# Altium PCB Светотиристор.PcbDoc
Units mm, origin at the board's own origin, x right, y up, seen from the top; angles counter-clockwise.
Board outline 33.88 x 24.43 mm, 2 copper layers (Top Layer, Bottom Layer); 2 components, 0 nets, 52 pads, 0 vias.
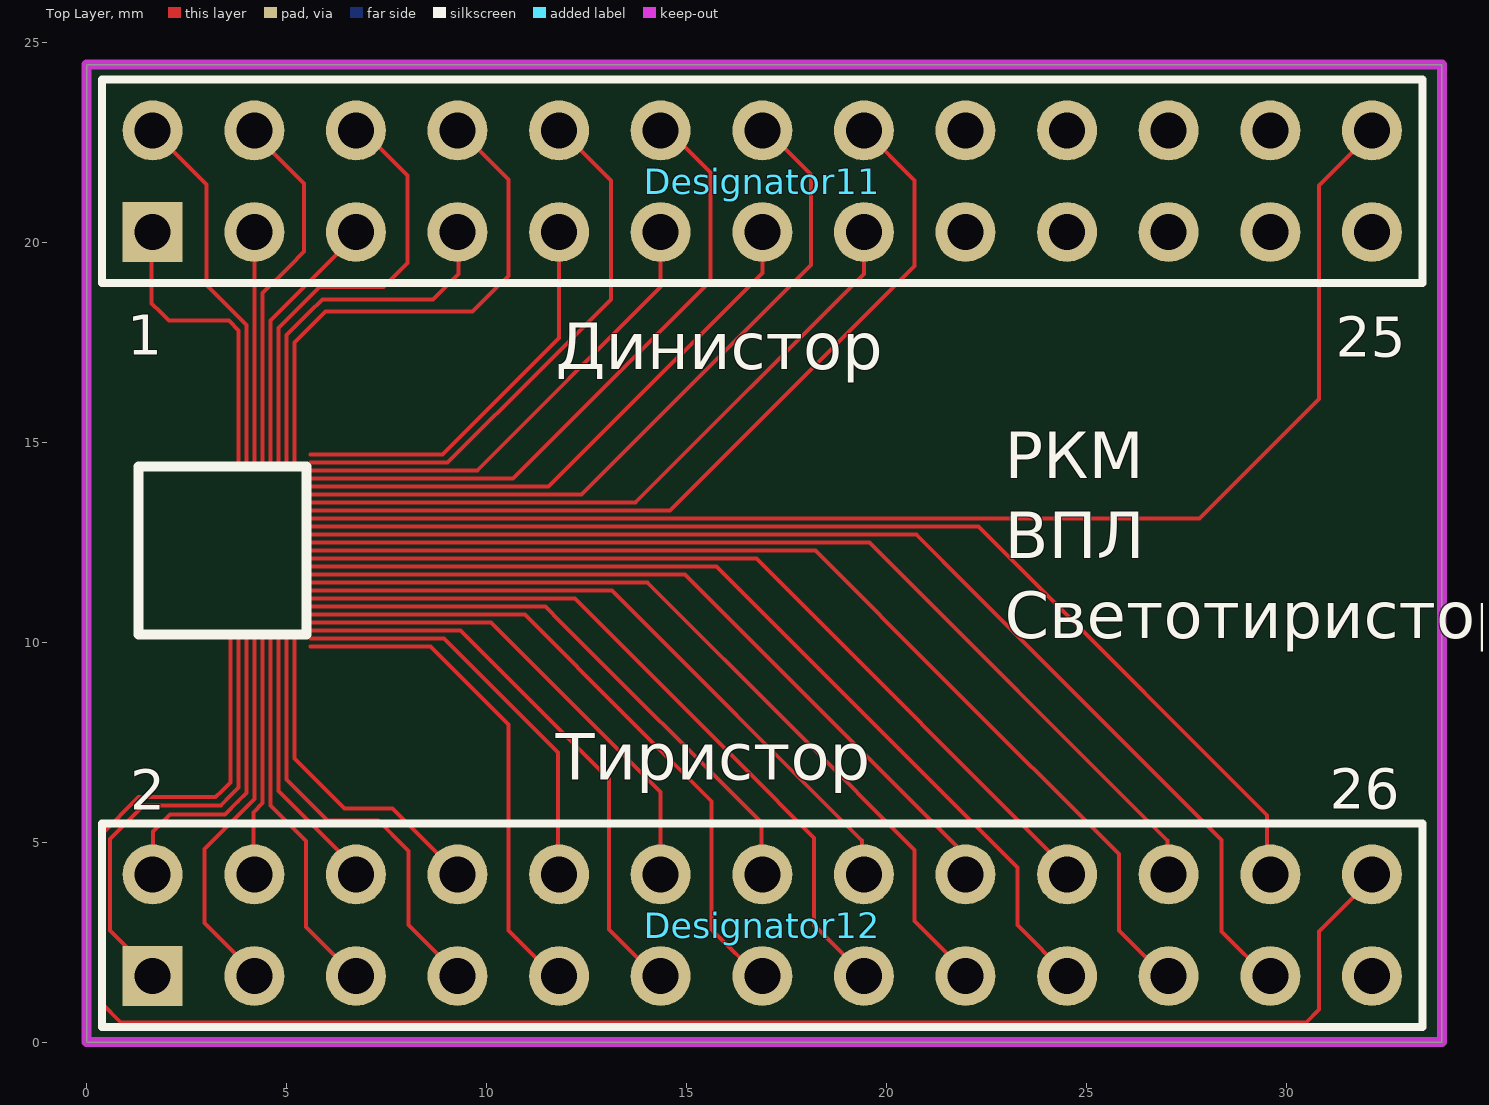
[diagram p0: Top Layer view]
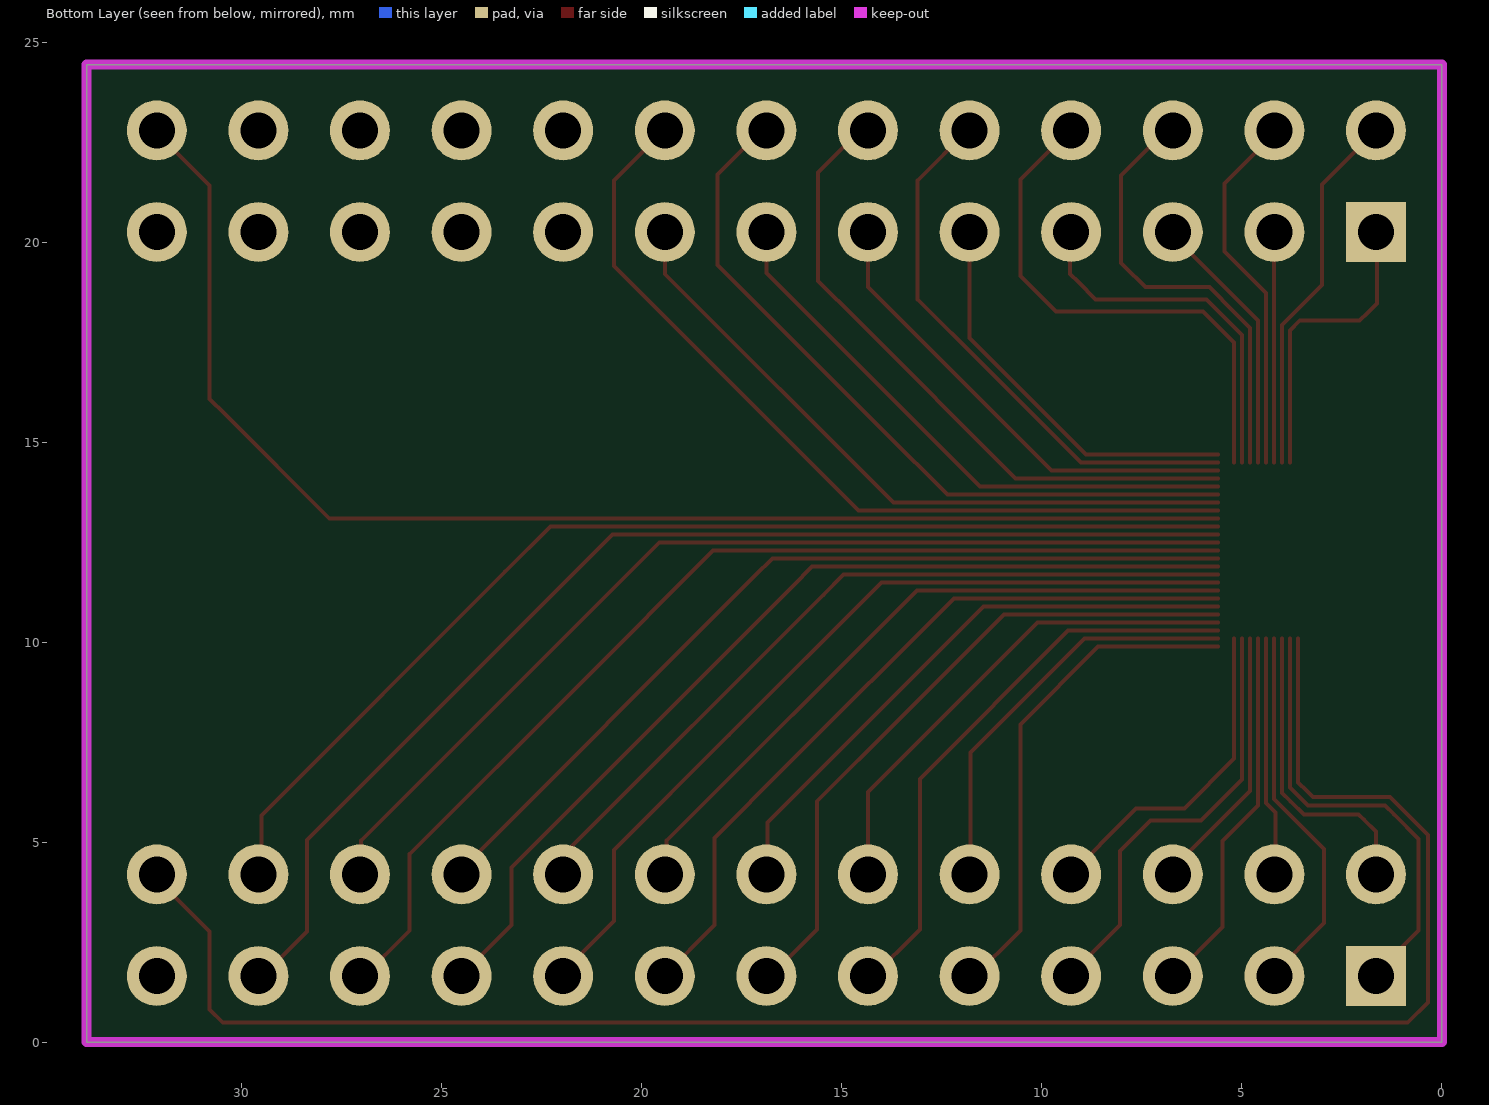
[diagram p1: Bottom Layer view, seen from below]

## Layer stack, top to bottom
Top Solder: solder mask 0.0102, Solder Resist, Dk 3.5
Top Layer: signal copper 0.0356
Dielectric 1: dielectric 0.32, FR-4, Dk 4.8
Bottom Layer: signal copper 0.0356
Bottom Solder: solder mask 0.0102, Solder Resist, Dk 3.5

## Board outline
0,0 33.884,0 33.884,24.435 0,24.435

## Design rules (kind name [scope] priority, off if disabled: settings)
Clearance [All] p1: gap=0 ignorepadtopadclearanceinfootprint=FALSE
PolygonConnect [All] p1: connectstyle=Relief reliefconductorwidth=0.254 reliefentries=4 polygonreliefangle="90 Angle" airgapwidth=0.254
RoutingVias [All] p1: holewidth=0.711 width=1.27 viastyle="Through Hole" minholewidth=0.711 minwidth=1.27 maxholewidth=0.711 maxwidth=1.27
SolderMaskExpansion [All] p1: expansion=0.102 istentingtop=FALSE
Width [All] p1: maxlimit=0.254 minlimit=0.1 preferedwidth=0.254
30 further rules are at their usual default settings.

## Components (designator, comment, footprint, x,y, rotation, side; value= is the part's Value field where it differs from the comment)
Designator11 "Comment" HDR2X13 1.651,20.251 r0 top
Designator12 "Comment" HDR2X13 1.651,1.651 r0 top

## Footprints (in the part's own frame and the unit in brackets; to place one, negate y for a bottom-side part, rotate by r counter-clockwise, add the part's x,y. Pads: shape width x height; smd on the part's side, far side on the other; paste and mask are expansions set on the pad)
HDR2X13 [mm] "Connector; Header; 13x2 Position"
  rect 1.5x1.5 hole 0.9: 1(0,0)
  round 1.5 hole 0.9: 2(0,2.54) 3(2.54,0) 4(2.54,2.54) 5(5.08,0) 6(5.08,2.54) 7(7.62,0) 8(7.62,2.54) 9(10.16,0) 10(10.16,2.54) 11(12.7,0) 12(12.7,2.54) 13(15.24,0) 14(15.24,2.54) 15(17.78,0) 16(17.78,2.54) 17(20.32,0) 18(20.32,2.54) 19(22.86,0) 20(22.86,2.54) 21(25.4,0) 22(25.4,2.54) 23(27.94,0) 24(27.94,2.54) 25(30.48,0) 26(30.48,2.54)
  silkscreen extent -1.27,-1.27 31.75,3.81

## Nets (pads, with @x,y where several pads share a name; then routed paths per layer and width w, separated by ;. In a path a pad name is that pad's centre, name@x,y a point inside that pad or via, vN(x,y) a via of type N, cw(c..) or ccw(c..) an arc to the next point about the centre after c; other vN are vias at no path point)
pads on no net: Designator11.1 Designator11.2 Designator11.3 Designator11.4 Designator11.5 Designator11.6 Designator11.7 Designator11.8 Designator11.9 Designator11.10 Designator11.11 Designator11.12 Designator11.13 Designator11.14 Designator11.15 Designator11.16 Designator11.17 Designator11.18 Designator11.19 Designator11.20 Designator11.21 Designator11.22 Designator11.23 Designator11.24 Designator11.25 Designator11.26 Designator12.1 Designator12.2 Designator12.3 Designator12.4 Designator12.5 Designator12.6 Designator12.7 Designator12.8 Designator12.9 Designator12.10 Designator12.11 Designator12.12 Designator12.13 Designator12.14 Designator12.15 Designator12.16 Designator12.17 Designator12.18 Designator12.19 Designator12.20 Designator12.21 Designator12.22 Designator12.23 Designator12.24 Designator12.25 Designator12.26
copper on no net: | length 664.6
  Top Layer w0.1: 1.422,20.549 1.626,20.345 1.626,18.466 1.854,18.237 2.057,18.034 3.556,18.034 3.796,17.794 3.796,17.486 3.796,14.986 3.796,14.486 ; 1.647,22.787 2.997,21.438 2.997,19.533 2.997,18.923 3.785,18.136 3.996,17.924 3.996,17.486 3.996,14.986 3.996,14.486 ; 1.656,4.191 1.656,5.262 1.956,5.563 2.083,5.69 3.023,5.69 3.454,5.69 3.785,6.02 3.996,6.231 3.996,7.086 3.996,9.586 3.996,10.086 ; 1.689,1.689 0.584,2.794 0.584,4.572 0.584,5.08 1.194,5.69 1.422,5.918 2.819,5.918 3.353,5.918 3.607,6.172 3.796,6.362 3.796,7.086 3.796,9.586 3.796,10.086 ; 3.596,10.086 3.596,9.586 3.596,7.086 3.596,6.492 3.378,6.274 3.226,6.121 2.032,6.121 1.295,6.121 0.356,5.182 0.356,0.991 0.864,0.483 30.48,0.483 30.81,0.813 30.81,2.769 32.182,4.14 ; 4.149,22.749 5.436,21.463 5.436,20.726 5.436,19.761 5.08,19.406 4.396,18.722 4.396,17.486 4.396,14.986 4.396,14.486 ; 4.166,4.191 4.166,5.74 4.396,5.971 4.396,7.086 4.396,9.586 4.396,10.086 ; 4.196,10.086 4.196,9.586 4.196,7.086 4.196,6.076 3.962,5.842 2.946,4.826 2.946,3.988 2.946,2.972 4.229,1.689 ; 4.196,14.486 4.196,14.986 4.196,17.486 4.196,20.351 ; 4.596,10.086 4.596,9.586 4.596,7.086 4.596,5.919 4.801,5.715 5.486,5.029 5.486,4.267 5.486,2.87 6.718,1.638 ; 4.596,14.486 4.596,14.986 4.596,17.486 4.596,18.033 6.773,20.209 ; 4.796,10.086 4.796,9.586 4.796,7.086 4.796,6.278 6.807,4.267 ; 4.796,14.486 4.796,14.986 4.796,17.486 4.796,17.852 5.182,18.237 5.817,18.872 6.655,18.872 7.417,18.872 7.95,19.406 8.026,19.482 8.026,20.549 8.026,21.666 6.902,22.791 6.731,22.791 ; 4.996,10.086 4.996,9.586 4.996,7.086 4.996,6.561 5.512,6.045 6.02,5.537 7.137,5.537 7.29,5.537 7.976,4.851 8.052,4.775 8.052,2.921 9.144,1.829 9.5,1.829 ; 4.996,14.486 4.996,14.986 4.996,17.486 4.996,17.671 5.563,18.237 5.893,18.567 6.807,18.567 8.661,18.567 9.093,18.999 9.296,19.202 9.296,20.498 ; 5.196,10.086 5.196,9.586 5.196,7.086 6.441,5.842 7.645,5.842 9.455,4.032 ; 5.196,14.486 5.196,14.986 5.196,17.486 5.972,18.263 7.137,18.263 9.652,18.263 10.16,18.771 10.541,19.152 10.541,20.041 10.541,21.565 9.293,22.813 ; 5.596,9.886 6.096,9.886 8.596,9.886 10.541,7.942 10.541,4.14 10.541,2.794 11.747,1.587 ; 5.596,10.086 6.096,10.086 8.596,10.086 8.938,10.086 11.786,7.239 11.786,4.191 ; 5.596,10.286 6.096,10.286 8.596,10.286 9.348,10.286 13.056,6.579 13.056,3.81 13.056,2.819 14.287,1.587 ; 5.596,10.486 6.096,10.486 8.596,10.486 10.113,10.486 14.351,6.248 14.351,3.861 ; 5.596,10.686 6.096,10.686 8.596,10.686 10.954,10.686 13.589,8.052 15.621,6.02 15.621,3.251 15.621,2.819 16.84,1.6 ; 5.596,10.886 6.096,10.886 8.596,10.886 11.466,10.886 11.862,10.49 16.866,5.486 16.866,3.937 ; 5.596,11.086 6.096,11.086 8.596,11.086 12.205,11.086 16.383,6.909 18.186,5.105 18.186,3.327 18.186,2.921 19.444,1.664 ; 5.596,11.286 6.096,11.286 8.596,11.286 13.129,11.286 19.382,5.032 19.382,4.24 19.431,4.191 ; 5.596,11.486 6.096,11.486 8.596,11.486 14.015,11.486 17.831,7.671 20.701,4.801 20.701,3.988 20.701,3.023 22.022,1.702 ; 5.596,11.686 6.096,11.686 8.596,11.686 14.958,11.686 15.469,11.176 21.971,4.674 21.971,4.191 ; 5.596,11.886 6.096,11.886 8.596,11.886 15.749,11.886 16.231,11.405 23.266,4.369 23.266,3.124 23.266,2.921 24.524,1.664 ; 5.596,12.086 6.096,12.086 8.596,12.086 16.743,12.086 17.17,11.659 24.575,4.255 ; 5.596,12.286 6.096,12.286 8.596,12.286 18.219,12.286 21.488,9.017 25.806,4.699 25.806,3.658 25.806,2.794 27,1.6 ; 5.596,12.486 6.096,12.486 8.596,12.486 19.568,12.486 27.022,5.032 27.022,4.22 27.051,4.191 ; 5.596,12.686 6.096,12.686 8.596,12.686 20.74,12.686 22.073,11.354 28.372,5.055 28.372,3.429 28.372,2.769 29.54,1.6 ; 5.596,12.886 6.096,12.886 8.596,12.886 22.293,12.886 23.419,11.76 29.515,5.664 29.515,4.191 ; 5.596,13.086 6.096,13.086 8.596,13.086 27.818,13.086 30.429,15.697 30.81,16.078 30.81,19.99 30.81,21.412 32.347,22.949 ; 5.596,13.286 6.096,13.286 8.596,13.286 14.582,13.286 15.977,14.681 20.701,19.406 20.701,20.701 20.701,21.539 19.44,22.8 ; 5.596,13.486 6.096,13.486 8.596,13.486 13.715,13.486 19.431,19.202 19.431,20.251 ; 5.596,13.686 6.096,13.686 8.596,13.686 12.366,13.686 13.945,15.265 18.11,19.431 18.11,20.523 18.11,21.692 16.951,22.851 ; 5.596,13.886 6.096,13.886 8.596,13.886 11.55,13.886 12.725,15.062 16.891,19.228 16.891,20.251 ; 5.596,14.086 6.096,14.086 8.596,14.086 10.657,14.086 14.63,18.059 15.596,19.025 15.596,20.371 15.596,21.742 14.547,22.791 14.351,22.791 ; 5.596,14.286 6.096,14.286 8.596,14.286 9.765,14.286 14.351,18.872 14.351,20.514 ; 5.596,14.486 6.096,14.486 8.596,14.486 9.025,14.486 11.455,16.916 13.106,18.567 13.106,20.523 13.106,21.539 11.833,22.813 ; 5.596,14.686 6.096,14.686 8.596,14.686 8.895,14.686 9.195,14.986 11.811,17.602 11.811,20.251

## Keep-outs
Keep-Out Layer:
  the board outline again, w0.254

## Silkscreen, mask and mechanical layers (free items; w line width, h text height)
Top Overlay:
  lines w0.254: 1.296,10.186 5.496,10.186 5.496,14.386 1.296,14.386 1.296,10.186
  text "1" at 1.01,17.188 h1
  text "25" at 31.224,17.137 h1
  text "Динистор" at 11.726,16.434 h2
  text "РКМ / ВПЛ / Светотиристор" at 22.953,9.712 h2
  text "Тиристор" at 11.726,6.172 h2
  text "26" at 31.072,5.834 h1
  text "2" at 1.086,5.808 h1
Top Solder:
  region: 3.683,17.586 3.683,14.386 5.296,14.386 5.296,17.586
  region: 3.496,10.186 3.496,6.986 5.296,6.986 5.296,10.186
  region: 5.496,14.786 5.496,9.786 8.696,9.786 8.696,14.786